# EAGLE board PDM (EAGLE 6.5.0)
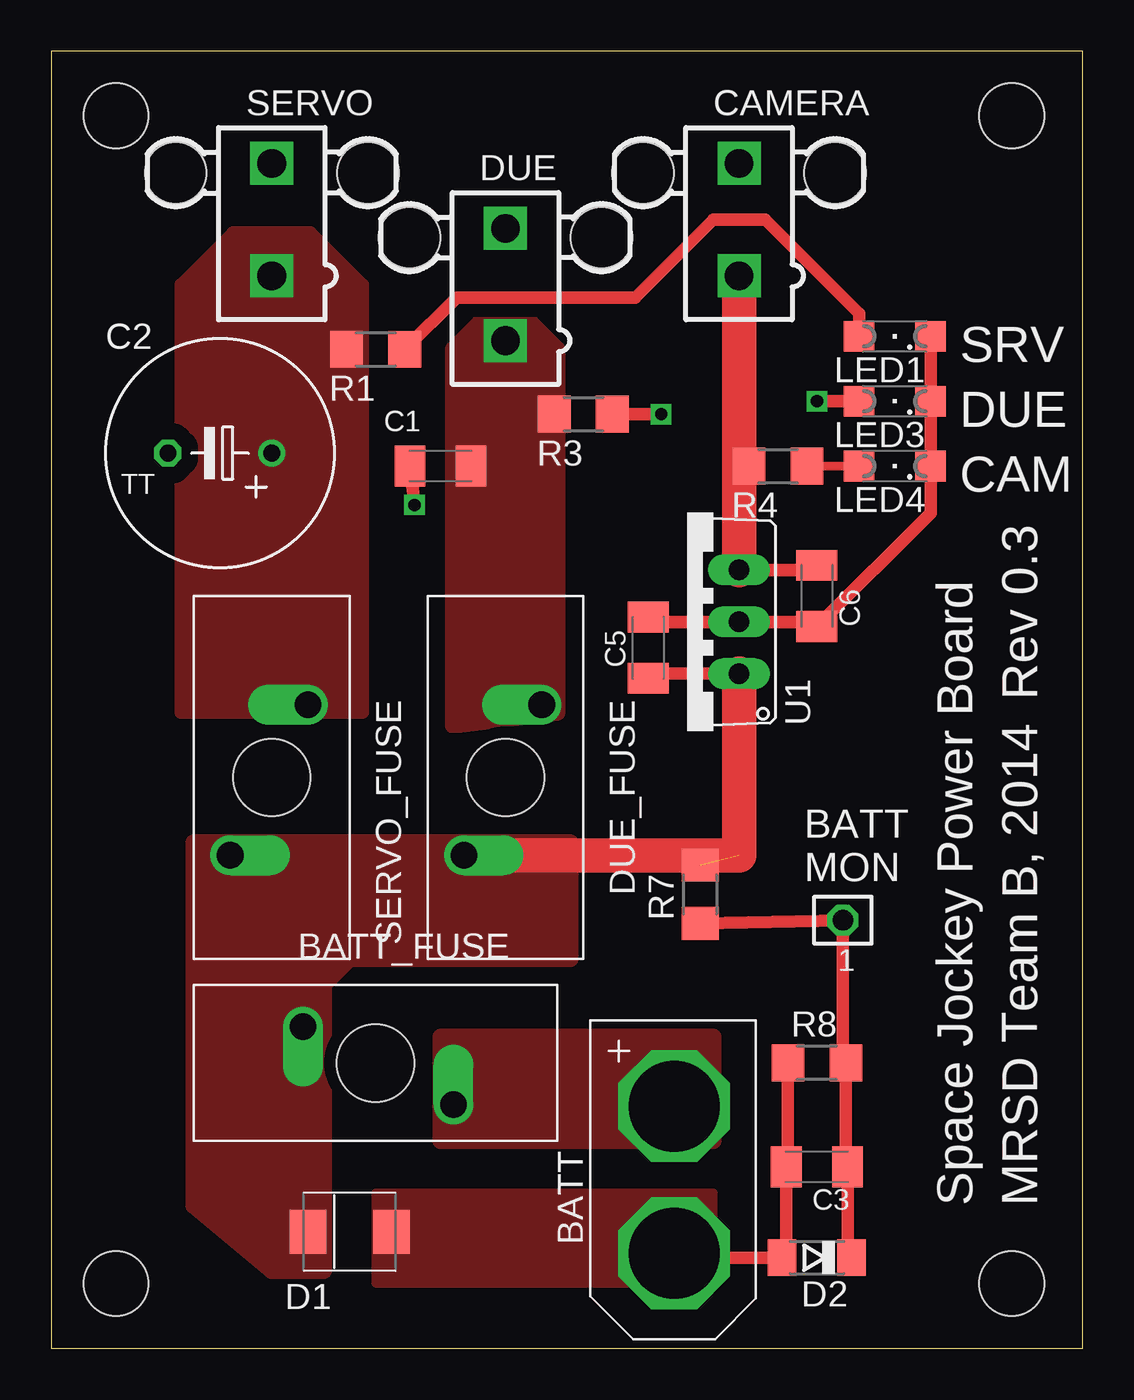
[diagram p0: board, top side]
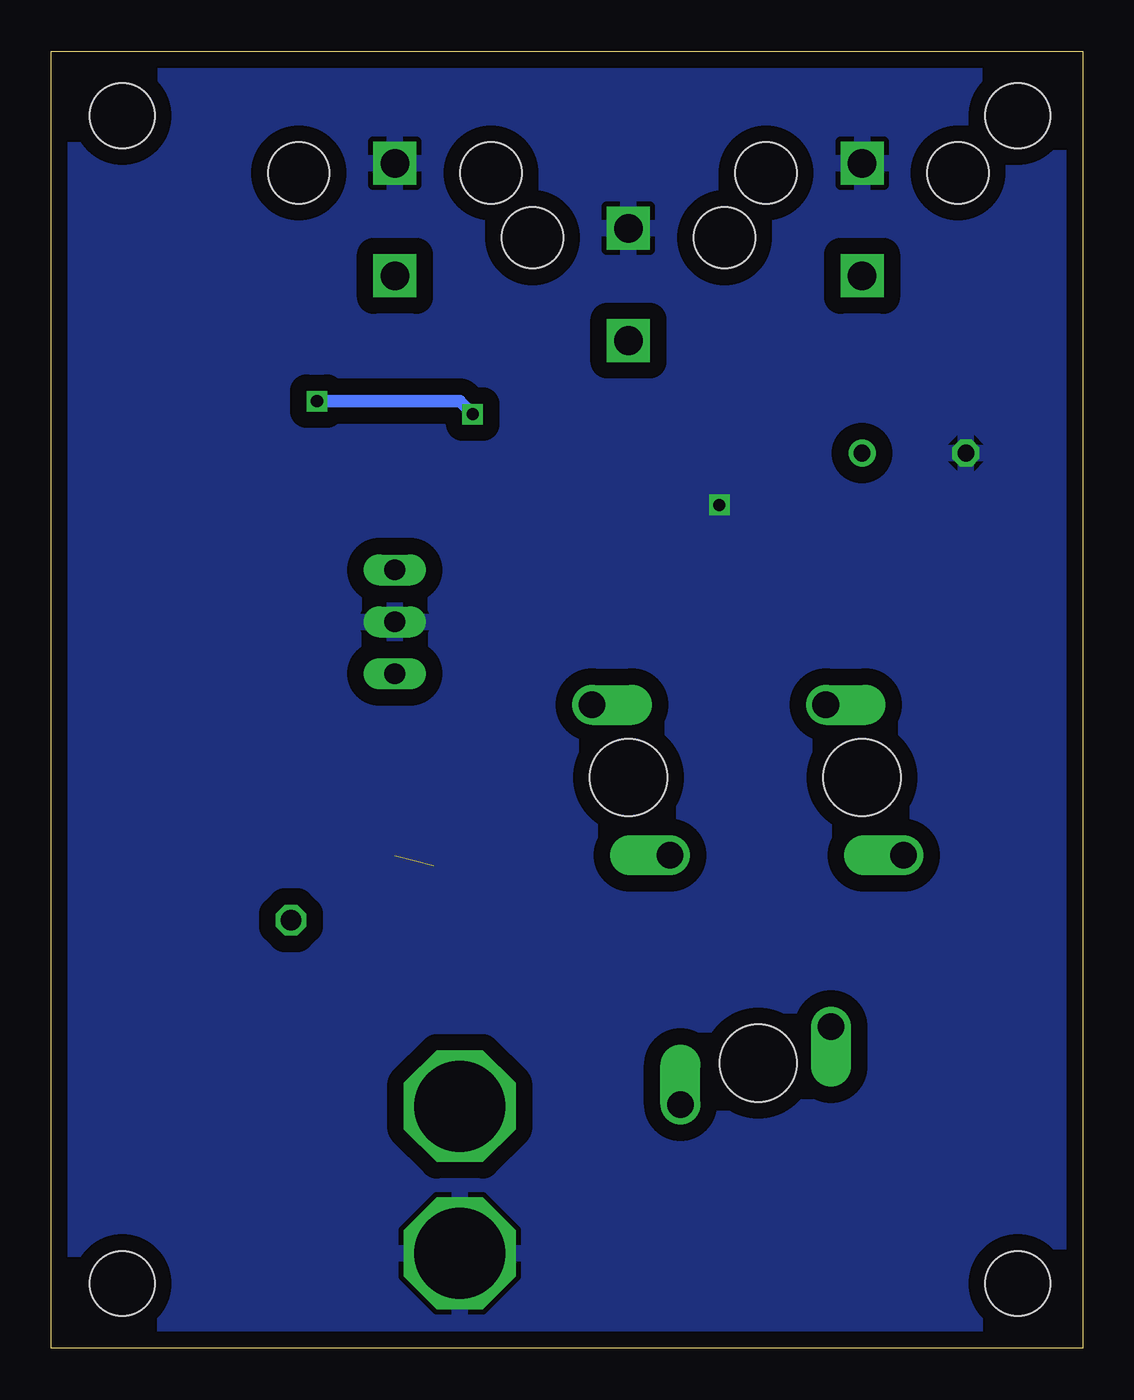
[diagram p1: board, bottom side, seen from below]

Size 50.47 x 63.49 mm. Coordinates in mm from the lower left corner, seen from the top.
Outline: 0,0 50.47,0 50.47,63.49 0,63.49 0,0
Copper layers (1*16): Top 0.035mm / dielectric 1.5mm / Bottom 0.035mm
Design rules "default *": minimum track width 10mil, minimum drill 16mil, track to track 8mil, track to pad 8mil, pad to pad 8mil, via to via 8mil, smd to smd 8mil, copper to edge 24mil, drill to drill 8mil, minimum pad ring 10mil, minimum via ring 8mil, stop-mask expansion 4mil, vias tented up to drill 0mil, thermal gap 10mil
Holes 3.17 mm at 3.17,3.17 46.99,3.17 3.17,60.33 46.99,60.33

## Footprints (pad centres in the part's own frame; a part is rotated, then mirrored left to right if it is on the bottom)
TSW-101-02-S-S = drill 1 pad 1.5 octagon: 1 0,0
CON_XT60_PCB_MALE = drill 4.445 octagon: V+ 3.6,0; V- -3.6,0
MINI_ATO = drill 1.3 offset: P$2 2.032,3.81; P$3 -1.778,-3.556 | hole 3.785: 0,0
C1206K = smd 1.5 x 2: 1 -1.5,0; 2 1.5,0
TT5D11 = drill 0.813: + -2.54,0 | drill 0.813 octagon: - 2.54,0
5566-2 = drill 1.4 square: 1 0,-2.75; 2 0,2.75 | hole 3: 4.7,2.29; -4.7,2.29
SMBJ = smd 1.78 x 2.16: A 2.04,0; C -2.03,0
SOD80C = smd 1.4 x 1.8: A 1.7,0; C -1.7,0
SML1206 = smd 1.5 x 1.5: A 1.75,0; C -1.75,0
R1206 = smd 1.6 x 1.803: 1 -1.422,0; 2 1.422,0
TO220V = drill 1.016 long: 1 -2.54,-2.54; 2 0,-2.54; 3 2.54,-2.54

## Placement (x,y rotation side)
BAT_MON  [TSW-101-02-S-S]  38.73,20.95 0 top
BATT  [CON_XT60_PCB_MALE]  30.48,8.26 90 top
BATT_FUSE  10A  [MINI_ATO]  15.88,13.97 270 top
C1  10uF  [C1206K]  19.05,43.18 180 top
C2  [TT5D11]  8.26,43.81 180 top
C3  10uF  [C1206K]  37.47,8.89 180 top
C5  10uF  [C1206K]  29.21,34.29 90 top
C6  10uF  [C1206K]  37.47,36.83 270 top
CAMERA  [5566-2]  33.66,55.24 0 top
D1  8.5V  [SMBJ]  14.61,5.71 0 top
D2  3.3V  [SOD80C]  37.47,4.45 180 top
DUE  [5566-2]  22.23,52.07 0 top
DUE_FUSE  2A  [MINI_ATO]  22.23,27.94 180 top
LED1  [SML1206]  41.27,49.53 180 top
LED3  [SML1206]  41.27,46.35 180 top
LED4  [SML1206]  41.27,43.18 180 top
R1  1K  [R1206]  15.88,48.9 180 top
R3  1K  [R1206]  26.04,45.72 180 top
R4  1K  [R1206]  35.56,43.18 180 top
R7  1.5K  [R1206]  31.75,22.23 90 top
R8  1K  [R1206]  37.47,13.97 0 top
SERVO  [5566-2]  10.79,55.24 0 top
SERVO_FUSE  7.5A  [MINI_ATO]  10.79,27.94 180 top
U1  [TO220V]  31.11,35.56 90 top

## Library data of the parts
BAT_MON = con-samtec; OC_FARNELL: unknown; OC_NEWARK: unknown
BATT BATT_FUSE D1 DUE_FUSE SERVO_FUSE U1 = MRSDTeamB
C1-C3 C5 C6 R1 R3 R4 R7 R8 = rcl
CAMERA DUE SERVO = con-molex; OC_FARNELL: 1822072; OC_NEWARK: unknown
D2 = diode
LED1 LED3 LED4 = led

## Nets
GND: BATT.V- C1.2 C2.- C3.2 C5.2 C6.2 CAMERA.2 D1.A D2.A DUE.2 LED1.C LED3.C LED4.C R8.1 SERVO.2 U1.2
N$2: BATT.V+ BATT_FUSE.P$2
N$4: C1.1 DUE.1 DUE_FUSE.P$3 R3.2
N$5: LED1.A R1.1
N$6: C6.1 CAMERA.1 R4.2 U1.3
N$11: LED3.A R3.1
N$13: LED4.A R4.1
N$15: C2.+ R1.2 SERVO.1 SERVO_FUSE.P$3
N$18: BAT_MON.1 C3.1 D2.C R7.1 R8.2
V_SUPPLY: BATT_FUSE.P$3 C5.1 D1.C DUE_FUSE.P$2 R7.2 SERVO_FUSE.P$2 U1.1

## Tracks (layer width: path | path; a pad name or v marks a point on that pad's centre or on a via)
GND  (via drill 0.6)
  Top 0.61: C1.2 v17.78,41.27 | C5.2 30.07,35.56 U1.2 37.47,35.56 C6.2 43.02,40.89 LED4.C LED3.C LED1.C | R8.1 36.04,8.97 C3.2 35.97,4.64 D2.A 30.69,4.45 BATT.V-
  pour Bottom (isolate 0.813): 0.64,62.87 49.53,62.87 49.53,0.64 0.64,0.64
  pour Top (isolate 1.27, no thermals): 15.88,7.62 32.38,7.62 32.38,3.17 15.88,3.17
N$2
  pour Top (isolate 0.61, no thermals): 19.05,10.16 19.05,15.24 32.38,15.24 32.38,10.16
N$4
  pour Top (isolate 0.61, no thermals): 19.68,30.48 19.68,48.9 20.95,50.16 23.5,50.16 24.77,48.9 24.77,31.11
N$5
  Top 0.61: R1.1 19.84,51.44 28.57,51.44 32.38,55.24 34.92,55.24 39.52,50.65 LED1.A
N$6
  Top 0.61: U1.3 37.23,38.1 C6.1 | R4.2 33.66,43.18
  Top 1.676: U1.3 33.66,43.18 CAMERA.1
N$11  (via drill 0.6)
  Top 0.61: R3.1 v29.84,45.72 | v37.47,46.35 LED3.A
  Bottom 0.61: v29.84,45.72 30.48,46.35 v37.47,46.35
N$13
  Top 0.406: R4.1 LED4.A
N$15
  pour Top (isolate 0.813, no thermals): 15.24,31.11 6.35,31.11 6.35,52.07 8.89,54.61 12.7,54.61 15.24,52.07
N$18
  Top 0.61: R7.1 BAT_MON.1 38.73,14.12 R8.2 38.89,8.41 38.73,8.26 38.73,8.66 C3.1 38.97,4.64 D2.C
V_SUPPLY  (1 unrouted)
  Top 0.61: U1.1 30.07,33.02 C5.1
  Top 1.676: DUE_FUSE.P$2 33.66,24.13 U1.1
  pour Top (isolate 0.61, no thermals): 13.34,17.78 13.34,3.81 10.79,3.81 6.99,6.99 6.99,24.77 25.4,24.77 25.4,19.05 14.61,19.05

## Text on the board
tPlace: SRV | DUE | CAM | Rev 0.3 | Space Jockey Power Board | MRSD Team B, 2014
tNames: BATT / MON